# Altium PCB ClickBoard.PcbDoc
Units mm, origin at the board's own origin, x right, y up, seen from the top; angles counter-clockwise.
Board outline 25.4 x 57.15 mm, 2 copper layers (Top Layer, Bottom Layer); 52 components, 58 nets, 189 pads, 225 vias.
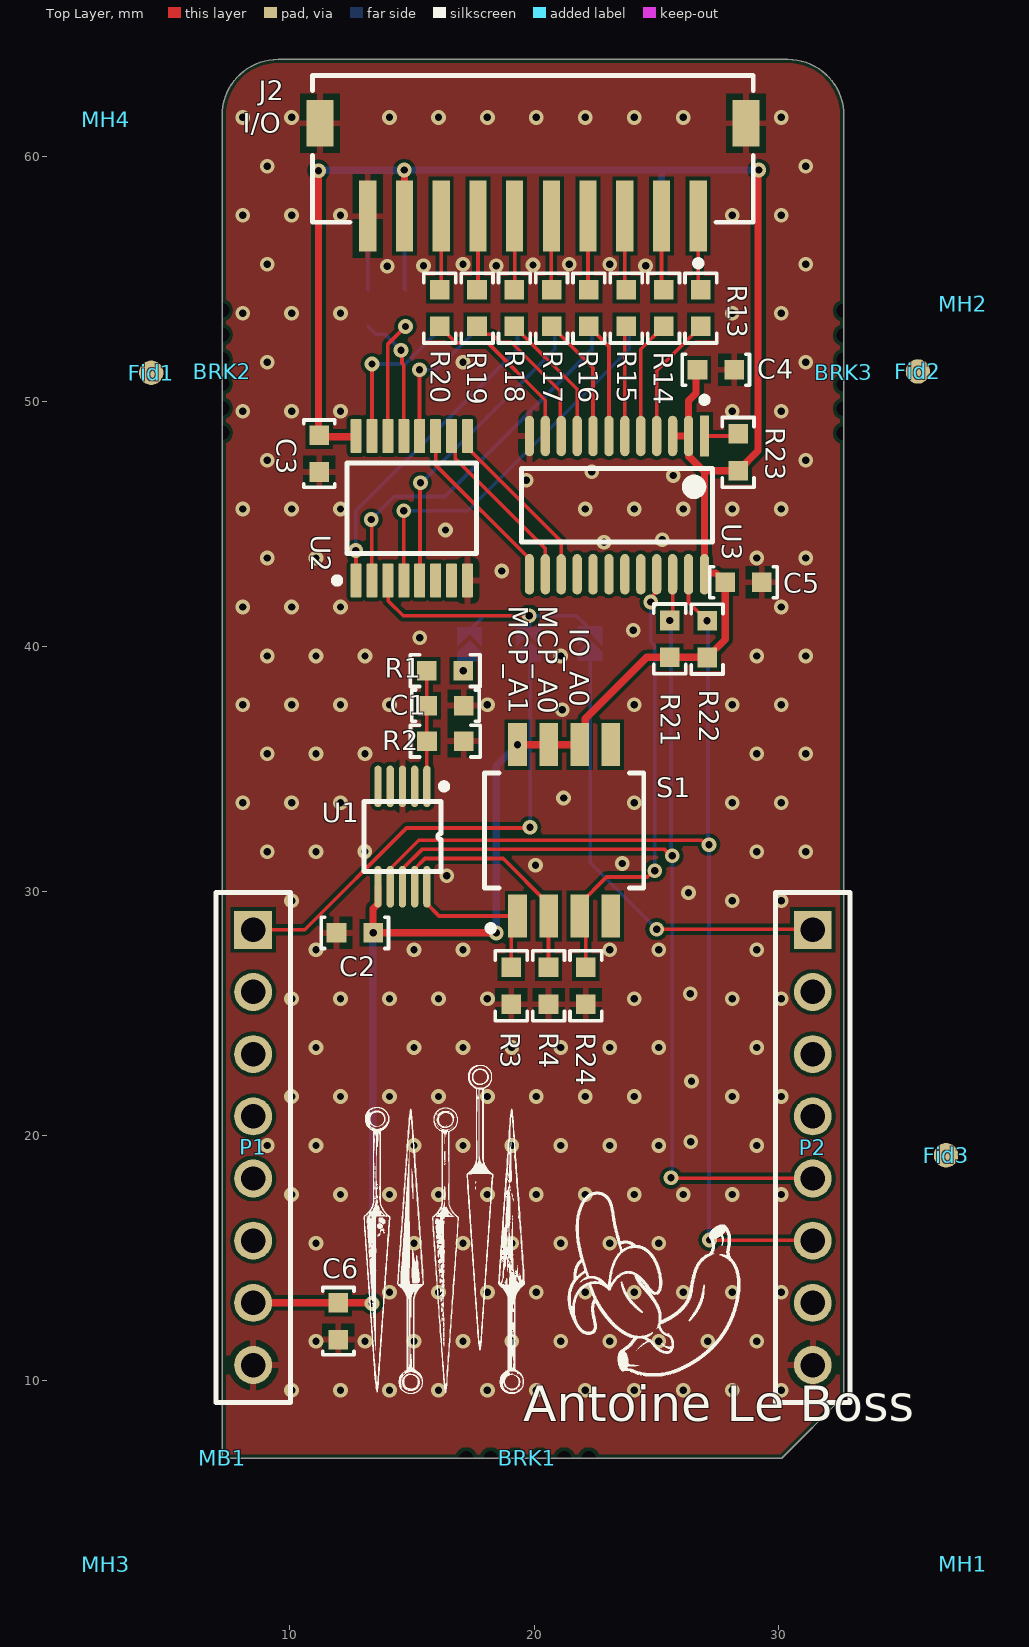
[diagram p0: Top Layer view]
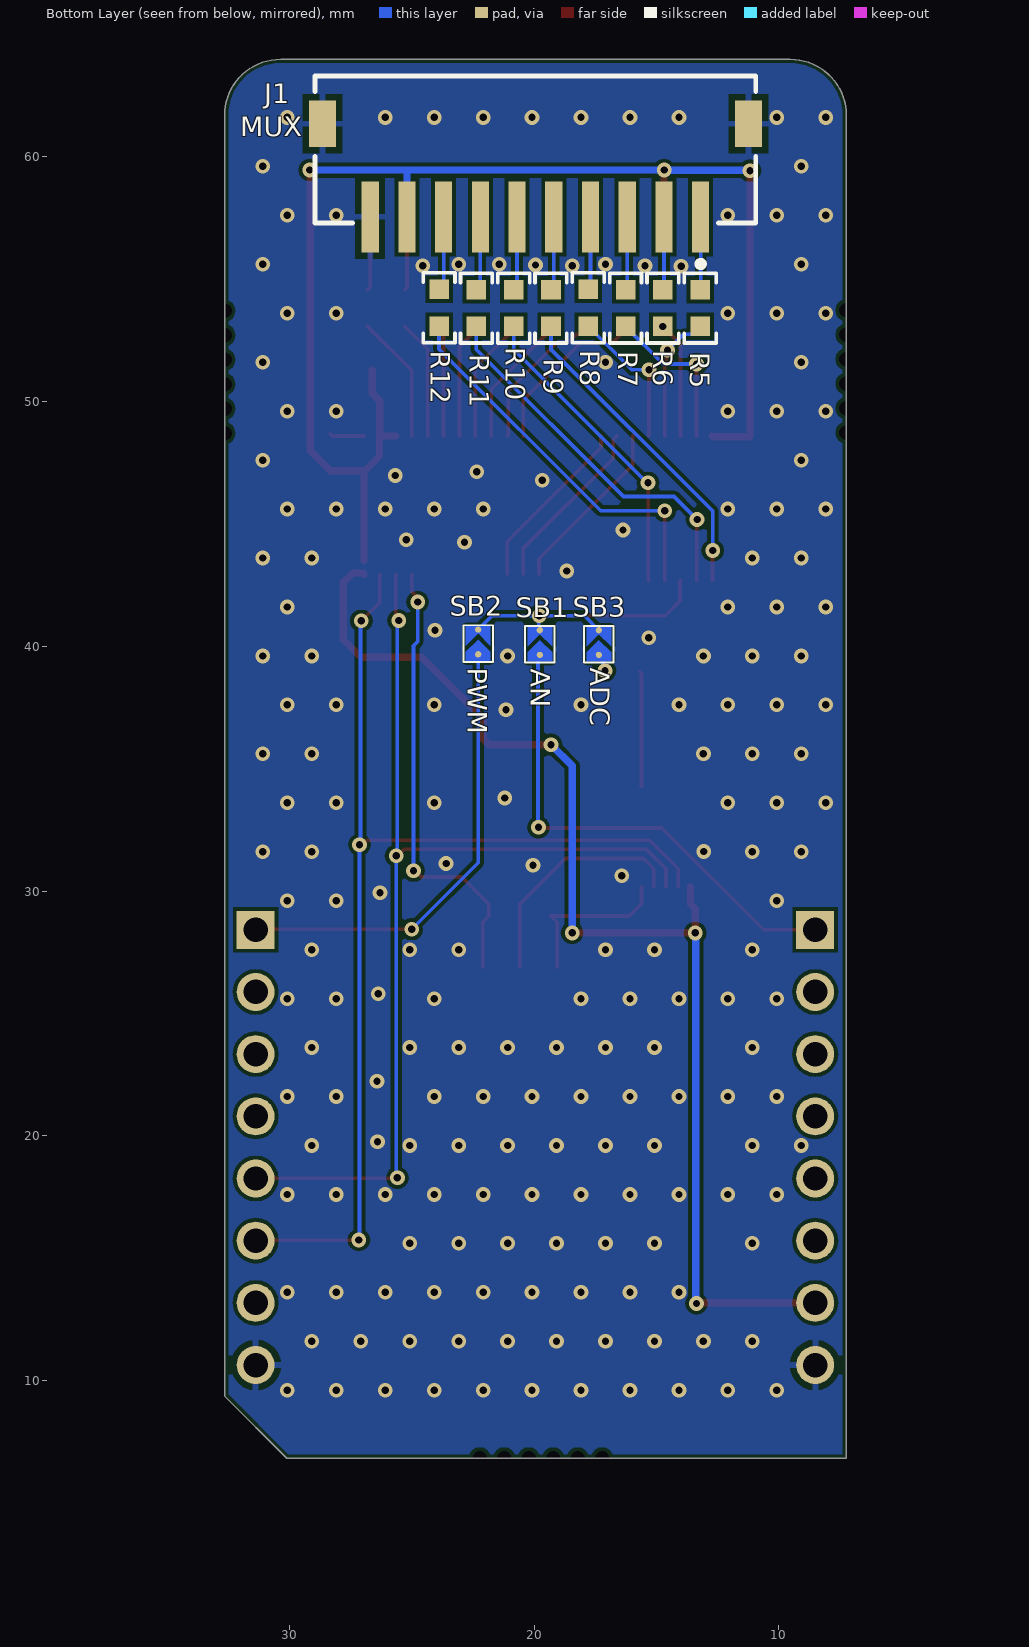
[diagram p1: Bottom Layer view, seen from below]

## Layer stack, top to bottom
Top Solder: solder mask 0.0102, Solder Resist, Dk 3.5
Top Layer: signal copper 0.0356
Dielectric 1: dielectric 0.32, FR-4, Dk 4.8
Bottom Layer: signal copper 0.0356
Bottom Solder: solder mask 0.0102, Solder Resist, Dk 3.5

## Board outline
7.25,6.825 7.25,61.689 cw(c9.536,61.689) 9.536,63.975 30.364,63.975 cw(c30.364,61.689) 32.65,61.689 32.65,9.365 30.11,6.825

## Design rules (kind name [scope] priority, off if disabled: settings)
BoardOutlineClearance [All] p1: gap=0.15 ignorepadtopadclearanceinfootprint=FALSE
Clearance [All] p1: gap=0.15 ignorepadtopadclearanceinfootprint=FALSE
ComponentClearance [All] p1: gap=0.254 collisioncheckmode=3 verticalgap=0.254 showdistances=FALSE donotcheckwithout3dbody=TRUE
HoleToHoleClearance [All] p1: gap=0.1 allowstackedmicrovias=TRUE
MinimumSolderMaskSliver [All] p1: minsoldermaskwidth=0.05
PlaneConnect PlaneConnectStitches [InNet('GND')] p1: pad.planeconnectstyle=Relief pad.reliefexpansion=0.508 pad.reliefentries=4 pad.reliefconductorwidth=0.254 pad.reliefairgap=0.254 via.planeconnectstyle=Direct via.reliefexpansion=0.508 via.reliefentries=4 via.reliefconductorwidth=0.254 via.reliefairgap=0.254
PlaneConnect [All] p2: planeconnectstyle=Relief reliefexpansion=0.508 reliefentries=4 reliefconductorwidth=0.254 reliefairgap=0.254
PolygonConnect [InNet('GND') vs InNet('GND')] p1: thpad.connectstyle=Relief thpad.reliefconductorwidth=0.254 thpad.reliefentries=4 thpad.polygonreliefangle="90 Angle" thpad.airgapwidth=0.254 smdpad.connectstyle=Relief smdpad.reliefconductorwidth=0.254 smdpad.reliefentries=4 smdpad.polygonreliefangle="90 Angle" smdpad.airgapwidth=0.254 via.connectstyle=Direct via.reliefconductorwidth=0.254 via.reliefentries=4 via.polygonreliefangle="90 Angle" via.airgapwidth=0.254
RoutingVias [All] p1: holewidth=0.3 width=0.6 viastyle="Through Hole" minholewidth=0.3 minwidth=0.6 maxholewidth=0.3 maxwidth=0.6
SilkToSilkClearance [All] p1: silktosilkclearance=0
SilkToSolderMaskClearance [IsPad] p1: minsilkscreentomaskgap=0 clearancetoexposedcopper=TRUE
SolderMaskExpansion [All] p1: expansion=0 istentingtop=FALSE
SupplyNets "Schematic Supply Nets_2" [InNet('3V3')] p1: voltage=0.000
SupplyNets "Schematic Supply Nets_1" [InNet('GND')] p2: voltage=0.000
SupplyNets "Schematic Supply Nets" [InNet('5V')] p3: voltage=0.000
Width WidthPWR [InNet('3V3')] p1: maxlimit=0.3 minlimit=0.3 preferedwidth=0.3
Width Widthall [All] p2: maxlimit=0.15 minlimit=0.15 preferedwidth=0.15
24 further rules are at their usual default settings.

## Classes and differential pairs
component class Page_Tete: BRK1 BRK2 BRK3 Fid1 Fid2 Fid3 MH1 MH2 MH3 MH4
net class S[0..7]: S0 S1 S2 S3 S4 S5 S6 S7
net class "P1 [0..2]": "P1 0" "P1 1" "P1 2"
net class "P0 [0..7]": "P0 0" "P0 1" "P0 2" "P0 3" "P0 4" "P0 5" "P0 6" "P0 7"
component class U_Selecteur: C3 SB1 SB2 SB3 U2
component class U_IOexpander: C4 C5 R21 R22 R23 R24 U3
component class U_Alimentation: C6 J1 J2 MB1 P1 P2 R5 R6 R7 R8 R9 R10 R11 R12 R13 R14 R15 R16 R17 R18 R19 R20
component class U_ADC: C1 C2 R1 R2 R3 R4 S1 U1

## Components (designator, comment, footprint, x,y, rotation, side; value= is the part's Value field where it differs from the comment)
BRK1 "DNP" BK_CRACK1B_M 22.225,6.825 r0 top value="Mouse Bites 2mm"
BRK2 "DNP" BK_CRACK1B_M 7.25,48.725 r270 top value="Mouse Bites 2mm"
BRK3 "DNP" BK_CRACK1B_M 32.65,53.7 r90 top value="Mouse Bites 2mm"
C1 "CAP CER 100nF 50V 0603" C_1608[0603] 16.375,37.575 r180 top value=100nF
C2 "CAP CER 100nF 50V 0603" C_1608[0603] 12.672,28.288 r0 top value=100nF
C3 "CAP CER 100nF 50V 0603" C_1608[0603] 11.222,47.869 r90 top value=100nF
C4 "CAP CER 100nF 50V 0603" C_1608[0603] 27.419,51.291 r180 top value=100nF
C5 "CAP CER 100nF 50V 0603" C_1608[0603] 28.549,42.611 r180 top value=100nF
C6 "CAP CER 2.2uF 10V X7R 0603" C_1608[0603] 12,12.425 r90 top value=2.2uF
Fid1 "DNP" FD_Fiducial 4.35,51.175 r0 top value="Fiducial mark"
Fid2 "DNP" FD_Fiducial 35.675,51.225 r90 top value="Fiducial mark"
Fid3 "DNP" FD_Fiducial 36.825,19.2 r90 top value="Fiducial mark"
J1 "HC-ZH-10PWT" J_S10B-ZR-SM4 19.95,60.292 r0 bottom
J2 "HC-ZH-10PWT" J_S10B-ZR-SM4 19.95,60.32 r180 top
MB1 "mikroBUS" mikroBUS-Large-No-Connector 7.25,6.825 r0 top locked
MH1 "DNP" MP_M-Hole_M2-NonPlated 37.5,2.5 r0 top value="Mounting Hole 2mm non plated"
MH2 "DNP" MP_M-Hole_M2-NonPlated 37.5,54 r90 top value="Mounting Hole 2mm non plated"
MH3 "DNP" MP_M-Hole_M2-NonPlated 2.5,2.5 r90 top value="Mounting Hole 2mm non plated"
MH4 "DNP" MP_M-Hole_M2-NonPlated 2.5,61.5 r90 top value="Mounting Hole 2mm non plated"
P1 "ESQ-108-14-T-S" CONN_SKT_01X08_100MIL-ELEVATED-LONGPIN 8.52,19.525 r270 top
P2 "ESQ-108-14-T-S" CONN_SKT_01X08_100MIL-ELEVATED-LONGPIN 31.38,19.525 r270 top
R1 "Res 1k 1% 0603" R_1608[0603] 16.358,39.002 r180 top value=1k
R2 "Res 1k 1% 0603" R_1608[0603] 16.37,36.126 r180 top value=1k
R3 "Res 10k 1% 0603" R_1608[0603] 19.061,26.129 r90 top value=10k
R4 "Res 10k 1% 0603" R_1608[0603] 20.585,26.129 r90 top value=10k
R5 "Res 1k 1% 0603" R_1608[0603] 13.219,53.815 r270 bottom value=1k
R6 "Res 1k 1% 0603" R_1608[0603] 14.743,53.815 r270 bottom value=1k
R7 "Res 1k 1% 0603" R_1608[0603] 16.267,53.815 r270 bottom value=1k
R8 "Res 1k 1% 0603" R_1608[0603] 17.791,53.827 r270 bottom value=1k
R9 "Res 1k 1% 0603" R_1608[0603] 19.315,53.815 r270 bottom value=1k
R10 "Res 1k 1% 0603" R_1608[0603] 20.839,53.815 r270 bottom value=1k
R11 "Res 1k 1% 0603" R_1608[0603] 22.363,53.815 r270 bottom value=1k
R12 "Res 1k 1% 0603" R_1608[0603] 23.887,53.827 r270 bottom value=1k
R13 "Res 1k 1% 0603" R_1608[0603] 26.808,53.815 r270 top value=1k
R14 "Res 1k 1% 0603" R_1608[0603] 25.284,53.815 r270 top value=1k
R15 "Res 1k 1% 0603" R_1608[0603] 23.76,53.815 r270 top value=1k
R16 "Res 1k 1% 0603" R_1608[0603] 22.236,53.815 r270 top value=1k
R17 "Res 1k 1% 0603" R_1608[0603] 20.712,53.815 r270 top value=1k
R18 "Res 1k 1% 0603" R_1608[0603] 19.188,53.815 r270 top value=1k
R19 "Res 1k 1% 0603" R_1608[0603] 17.664,53.815 r270 top value=1k
R20 "Res 1k 1% 0603" R_1608[0603] 16.14,53.815 r270 top value=1k
R21 "Res 10k 1% 0603" R_1608[0603] 25.538,40.302 r270 top value=10k
R22 "Res 10k 1% 0603" R_1608[0603] 27.062,40.29 r270 top value=10k
R23 "Res 10k 1% 0603" R_1608[0603] 28.332,47.922 r270 top value=10k
R24 "Res 10k 1% 0603" R_1608[0603] 22.109,26.129 r90 top value=10k
S1 "DSHP04TSGER" S_DIP_SWITCH_50MIL_4POS 21.22,32.479 r0 top value="DIP Switch 4pos"
SB1 "Open" SB-TINY-OPEN 19.772,40.15 r90 bottom
SB2 "Open" SB-TINY-OPEN 22.287,40.175 r90 bottom
SB3 "Open" SB-TINY-OPEN 17.359,40.15 r90 bottom
U1 "MCP3423-E/UN" U_MSOP50P300X500-10(RM-10)_WO-TP 14.616,32.225 r180 top
U2 "TMUX1308PWR" U_TSSOP65P500X450-16 14.997,45.636 r0 top
U3 "PCAL6416APW,118" U_TSSOP24_SOT355-1-IPC_B 23.379,45.763 r180 top

## Footprints (in the part's own frame and the unit in brackets; to place one, negate y for a bottom-side part, rotate by r counter-clockwise, add the part's x,y. Pads: shape width x height; smd on the part's side, far side on the other; paste and mask are expansions set on the pad)
BK_CRACK1B_M [mm] "Cracker métrique NPTH"
  round 0 hole 0.6 unplated: 1(0,0) 2(-1,0) 3(-2,0) 4(-3,0) 5(-4,0) 6(-5,0)
C_1608[0603] [mm] "Capacitor MLCC; Body 1.6 x 0.8 mm (LxW typ)"
  rect 0.8x0.8 smd: 1(-0.75,0) 2(0.75,0)
  silkscreen extent -1.38,-0.64 1.38,0.64, body extent -0.8,-0.4 0.8,0.4, height 0.8
CONN_SKT_01X08_100MIL-ELEVATED-LONGPIN [mm] "SQ Post Socket, 1x8 Pins, Vertical, 2.54mm Pitch, Female"
  rect 1.55x1.55 hole 1: 1(-8.89,0)
  round 1.55 hole 1: 2(-6.35,0) 3(-3.81,0) 4(-1.27,0) 5(1.27,0) 6(3.81,0) 7(6.35,0) 8(8.89,0)
  silkscreen extent -10.41,-1.52 10.42,1.52, body extent -10.66,-1.37 10.66,1.37, height 0.25
FD_Fiducial [mm] "Fiducial"
  round 1 smd paste-0.5 mask+1: 1(0,0)
J_S10B-ZR-SM4 [mm] "CONN HEADER SMD 10POS 1MM5 RA"
  rect 0.7x2.9 smd paste+0 mask+0: 1(-6.75,2.75) 2(-5.25,2.75) 3(-3.75,2.75) 4(-2.25,2.75) 5(-0.75,2.75) 6(0.75,2.75) 7(2.25,2.75) 8(3.75,2.75) 9(5.25,2.75) 10(6.75,2.75)
  rect 1.1x1.9 smd paste+0 mask+0: 11(8.7,-1.05) 12(-8.7,-1.05)
  silkscreen extent -9,-3 9,4.8, body extent -9,-3 9,3.5, height 3.7
mikroBUS-Large-No-Connector [mm]
MP_M-Hole_M2-NonPlated [mm] "Monting Hole M2 non plated"
  round 1.5 hole 2 unplated paste-2539.97: 1(0,0)
R_1608[0603] [mm] "Chip Resistor; Body 1.6 x 0.8 mm (LxW typ)"
  rect 0.8x0.8 smd: 1(-0.75,0) 2(0.75,0)
  silkscreen extent -1.43,-0.65 1.43,0.65, body extent -0.77,-0.42 0.78,0.43, height 0.45
S_DIP_SWITCH_50MIL_4POS [mm] "Dip switch 4pos, pitch 1.27mm, height 1.55mm"
  rect 0.76x1.75 smd paste+0 mask+0: 1(-1.903,-3.5) 2(-0.633,-3.5) 3(0.637,-3.5) 4(1.907,-3.5) 5(1.907,3.5) 6(0.637,3.5) 7(-0.633,3.5) 8(-1.903,3.5)
  silkscreen extent -3.25,-4.12 3.26,2.35, body extent -3.35,-3.8 3.36,3.8, height 0.25
SB-TINY-OPEN [mil]
  round 10 smd paste-10 mask+0.04: 1(-19.84,0)
  round 10 smd paste-10.08 mask+0.04: 2(19.84,0)
  Top Layer region: -6.06,19.68 13.62,0 -6.06,-19.68 24.84,-19.68 24.84,19.68
  Top Layer region: -30.16,-19.68 -30.16,19.68 -15.91,19.68 3.78,0 -15.91,-19.68
  silkscreen extent -32,-24 27,24
U_MSOP50P300X500-10(RM-10)_WO-TP [mm] "Shrink Small Outline; 10 Leads; Body Width 3 mm; Pitch 0.5 mm"
  oval 0.3x1.7 smd mask+0.05: 1(-1,-2.05) 2(-0.5,-2.05) 3(0,-2.05) 4(0.5,-2.05) 5(1,-2.05) 6(1,2.05) 7(0.5,2.05) 8(0,2.05) 9(-0.5,2.05) 10(-1,2.05)
  silkscreen extent -1.83,-2.17 1.58,1.43, body extent -1.6,-2.58 1.6,2.57, height 1.09
U_TSSOP24_SOT355-1-IPC_B [mm]
  rect 0.381x1.655 smd paste+0 mask+0: 1(-3.575,-2.825)
  rrect100% 0.381x1.655 smd paste+0 mask+0: 2(-2.925,-2.825) 3(-2.275,-2.825) 4(-1.625,-2.825) 5(-0.975,-2.825) 6(-0.325,-2.825) 7(0.325,-2.825) 8(0.975,-2.825) 9(1.625,-2.825) 10(2.275,-2.825) 11(2.925,-2.825) 12(3.575,-2.825) 13(3.575,2.825) 14(2.925,2.825) 15(2.275,2.825) 16(1.625,2.825) 17(0.975,2.825) 18(0.325,2.825) 19(-0.325,2.825) 20(-0.975,2.825) 21(-1.625,2.825) 22(-2.275,2.825) 23(-2.925,2.825) 24(-3.575,2.825)
  silkscreen extent -3.9,-4.43 3.9,1.5, body extent -4.15,-3.9 4.15,3.9, height 0.25
U_TSSOP65P500X450-16 [mm] "SOP, 16-Leads, Body 5x4.5mm, Pitch 0.65mm, IPC Medium Density"
  rrect22% 0.45x1.4 smd: 1(-2.275,-2.95) 2(-1.625,-2.95) 3(-0.975,-2.95) 4(-0.325,-2.95) 5(0.325,-2.95) 6(0.975,-2.95) 7(1.625,-2.95) 8(2.275,-2.95) 9(2.275,2.95) 10(1.625,2.95) 11(0.975,2.95) 12(0.325,2.95) 13(-0.325,2.95) 14(-0.975,2.95) 15(-1.625,2.95) 16(-2.275,2.95)
  silkscreen extent -3.17,-3.07 2.65,1.85, body extent -3,-4.35 3,4.35, height 0.25

## Part data
BRK1 BRK2 BRK3: library part BK_BREAKOUT_2MM, "Mouse Bites", Mounting Technology=N/A
C1 C2 C3 C4 C5: library part CAP002, "Capacitor type 1", Dielectric=X7R, Manufacturer 1=Yageo, Manufacturer Part Number 1=CC0603KRX7R9BB104, Rated Voltage=50V, Supplier Part Number 1=C14663, Tolerance=10%, Code CEGEP=COND0143SM, LibRef=CAP002, Mounting Technology=SMT, Supplier 1=LCSC
C6: library part CAP022, "Capacitor type 1", Dielectric=X7R, Manufacturer 1=Samsung, Manufacturer Part Number 1=CL10B225KP8NNNC, Rated Voltage=10V, Supplier Part Number 1=C100082, Tolerance=10%, LibRef=CAP022, Mounting Technology=SMT, Supplier 1=LCSC
Fid1 Fid2 Fid3: library part Fiducial, "Fiducial mark for alignement and Pick&Place", Mounting Technology=N/A
J1 J2: library part CONN-1MM5-01X10-S10B-H-SMT, "CONN wire to board SMT R/A 10POS 1.5mm", Manufacturer 1=HCTL, Manufacturer 2=JST, Manufacturer Part Number 2=S10B-ZR-SM4A-TF(LF)(SN), Supplier Part Number 1=C2845432, Manufacturer Part Number 1=HC-ZH-10PWT, Mounting Technology=SMT, Supplier 1=LCSC, Supplier 2=LCSC, Supplier 3=Digikey, Supplier Part Number 2=C5149249, Supplier Part Number 3=455-1700-1-ND
MB1: library part "mikroBUS compatible add-on board", "mikroBUS compatible add-on board"
MH1 MH2 MH3 MH4: library part MH-2MM_NP, "Mounting Hole 2mm non plated", Supplier Part Number 1=N/A, Manufacturer Part Number 1=DNP, Mounting Technology=N/A
P1 P2: library part CONN-100MIL-SKT-01X08_ELEVATED_LONGPIN, "CONN SOCKET 8pos 100mils Elevated", Manufacturer 1=Samtec, Supplier Part Number 1=SAM9303-ND, Manufacturer Part Number 1=ESQ-108-14-T-S, Mounting Technology=TH, Supplier 1=Digikey
R1 R2 R5 R6 R7 R8 R9 R10 R11 R12 R13 R14 R15 R16 R17 R18 R19 R20: library part RES015, "Resistor type 1", Manufacturer 1=Yageo, Manufacturer Part Number 1=RC0603FR-071KL, Max Working Voltage=75V, Supplier Part Number 1=C22548, Tolerance=1%, LibRef=RES015, Mounting Technology=SMT, Puissance=1/10W, Supplier 1=LCSC
R3 R4 R21 R22 R23 R24: library part RES001, "Resistor type 1", Manufacturer 1=Yageo, Manufacturer Part Number 1=RC0603FR-0710KL, Max Working Voltage=75V, Supplier Part Number 1=C98220, Tolerance=1%, Code CEGEP=RESI0238-0603, LibRef=RES001, Mounting Technology=SMT, Puissance=1/10W, Supplier 1=LCSC
S1: library part SW_DIP_50MIL_4POS, "SWITCH DIP SLIDE SPST 25MA 24V, pitch 1.27mm, height 1.55mm", Manufacturer 1=kangshen, Manufacturer 2=Omron, Manufacturer Part Number 2=A6H-4102-PM, Supplier Part Number 1=C3293144, Manufacturer Part Number 1=DSHP04TSGER, Mounting Technology=SMT, Supplier 1=LCSC, Supplier 2=LCSC, Supplier 3=Digikey, Supplier Part Number 2=C2733274, Supplier Part Number 3=39-A6H-4102-PMCT-ND
SB1 SB2 SB3: library part Solder-Jumper-Open, "Solder Jumper"
U1: library part U_MCP3423-E/UN, "CAN Controller Stand-Alone With SPI, 18-Pin PDIP", Manufacturer 1=Microchip, Supplier Part Number 1=C220864, Manufacturer Part Number 1=MCP3423-E/UN, Mounting Technology=SMT, Supplier 1=LCSC, Supplier 2=Digikey, Supplier Part Number 2=MCP3423-E/UN-ND
U2: library part U_TMUX1308PWR, "IC MUX 8:1 195OHM 16TSSOP", Manufacturer 1=TI, Supplier Part Number 1=C970231, Manufacturer Part Number 1=TMUX1308PWR, Mounting Technology=SMT, Supplier 1=LCSC, Supplier 2=Digikey, Supplier Part Number 2=296-TMUX1308PWRCT-ND
U3: library part U_PCAL6416APW, "IC I/O EXPANDER 16BIT 24TSSOP", Manufacturer 1="Texas Instruments", Manufacturer 2="NXP Semiconductors", Manufacturer Part Number 1=TCA6416APWR, Supplier Part Number 1=C130203, Manufacturer Part Number 2=PCAL6416APW,118, Mounting Technology=SMT, Supplier 1=LCSC, Supplier 2=LCSC, Supplier 3=Digikey, Supplier Part Number 2=C2652299, Supplier Part Number 3=568-9922-1-ND

## Via types
v1: diameter 0.6, hole 0.3, Top Layer to Bottom Layer, tented both sides, 221 vias
v2: diameter 0.6, hole 0.3, Top Layer to Bottom Layer, tented bottom, 4 vias

## Nets (pads, with @x,y where several pads share a name; then routed paths per layer and width w, separated by ;. In a path a pad name is that pad's centre, name@x,y a point inside that pad or via, vN(x,y) a via of type N, cw(c..) or ccw(c..) an arc to the next point about the centre after c; other vN are vias at no path point)
3V3: C2.2 C3.2 C4.2 C5.2 C6.2 J1.9 J2.9 P1.7 R21.2 R22.2 R23.2 S1.6 S1.7 S1.8 U1.6 U2.16 U3.2 U3.3 U3.24 | length 106.3
  Top Layer w0.3: P1.7 13.346,13.175 v1(13.371,13.15) ; v1(11.187,59.428) 11.187,48.557 12.693,48.557 U2.16 ; C2.2@13.415,28.288 13.415,29.274 13.616,29.475 U1.6 ; v1(13.422,28.288) v1(18.451,28.288) ; J2.9 v1@14.7,59.479 ; v2(19.317,35.979) S1.7 S1.6 22.087,36.209 22.087,37.041 24.598,39.552 R21.2 25.544,39.546 27.056,39.546 R22.2 27.799,40.277 C5.2 27.419,42.991 26.991,42.991 26.954,42.954 U3.24 ; U3.3 U3.2 ; C4.2@26.612,51.275 26.612,50.335 26.304,50.027 U3.2 ; U3.24@26.954,43.484 26.954,47.127 ; v1(29.17,59.454) 29.145,59.428 29.145,47.985 R23.2 26.999,47.172 26.954,47.127 ; U3.2 26.319,48.573 26.319,47.762 26.954,47.127
  Bottom Layer w0.3: v1(11.187,59.428) 11.2,59.441 14.679,59.441 v1(14.692,59.454) 25.2,59.454 ; v1(13.371,13.15) 13.397,13.175 13.397,28.263 v1(13.422,28.288) ; v1(18.451,28.288) 18.451,35.113 v2(19.317,35.979) ; J1.9 25.2,59.454 ; v1(29.17,59.454) 25.2,59.454
5V: P2.7
ADC: R1.1 SB3.1 | length 0.7
  Bottom Layer w0.15: v2(17.108,39.002) 17.194,39.089 17.194,39.452 17.359,39.618 SB3.1
AN: P1.1 SB1.1 | length 19.8
  Top Layer w0.15: P1.1 10.626,28.415 14.786,32.575 19.8,32.575 v1(19.825,32.6)
  Bottom Layer w0.15: v1(19.825,32.6) 19.842,32.617 19.842,39.339
CS: P1.3
E\N\: U2.6
GND: C1.1 C2.1 C3.1 C4.1 C5.1 C6.1 J1.10 J1.11 J1.12 J2.10 J2.11 J2.12 P1.8 P2.8 R2.1 R3.1 R4.1 R24.1 U1.3 U2.8 U3.12
  other v1: 10.088,9.604 12.088,9.604 14.088,9.604 16.088,9.604 18.088,9.604 20.088,9.604 22.088,9.604 24.088,9.604 26.088,9.604 28.088,9.604 30.088,9.604 11.088,11.604 13.088,11.604 15.088,11.604 17.088,11.604 19.088,11.604 21.088,11.604 23.088,11.604 25.088,11.604 27.088,11.604 29.088,11.604 14.088,13.604 16.088,13.604 18.088,13.604 20.088,13.604 22.088,13.604 24.088,13.604 26.088,13.604 28.088,13.604 30.088,13.604 11.088,15.604 15.088,15.604 17.088,15.604 19.088,15.604 21.088,15.604 23.088,15.604 25.088,15.604 10.088,17.604 12.088,17.604 14.088,17.604 16.088,17.604 18.088,17.604 20.088,17.604 22.088,17.604 24.088,17.604 26.088,17.604 28.088,17.604 30.088,17.604 9.088,19.604 11.088,19.604 15.088,19.604 17.088,19.604 19.088,19.604 21.088,19.604 23.088,19.604 25.088,19.604 29.088,19.604 26.4,19.75 10.088,21.604 12.088,21.604 14.088,21.604 16.088,21.604 18.088,21.604 20.088,21.604 22.088,21.604 24.088,21.604 28.088,21.604 30.088,21.604 26.425,22.225 11.088,23.604 15.088,23.604 17.088,23.604 19.088,23.604 21.088,23.604 23.088,23.604 25.088,23.604 29.088,23.604 10.088,25.604 12.088,25.604 14.088,25.604 16.088,25.604 18.088,25.604 24.088,25.604 28.088,25.604 30.088,25.604 26.375,25.8 11.088,27.604 15.088,27.604 17.088,27.604 23.088,27.604 25.088,27.604 29.088,27.604 10.088,29.604 28.088,29.604 30.088,29.604 26.3,29.925 16.425,30.625 20.05,31.05 23.6,31.125 9.088,31.604 11.088,31.604 13.08,31.612 29.088,31.604 31.088,31.604 8.088,33.604 10.088,33.604 12.088,33.604 24.088,33.604 28.088,33.604 30.088,33.604 21.2,33.8 9.088,35.604 11.088,35.604 13.088,35.604 29.088,35.604 31.088,35.604 21.15,37.4 8.088,37.604 10.088,37.604 12.088,37.604 14.088,37.604 18.088,37.604 24.088,37.604 28.088,37.604 30.088,37.604 9.088,39.604 11.088,39.604 13.088,39.604 21.088,39.604 29.088,39.604 31.088,39.604 15.325,40.35 24.05,40.65 8.088,41.604 10.088,41.604 12.088,41.604 30.088,41.604 18.675,43.075 9.088,43.604 11.088,43.604 29.088,43.604 31.088,43.604 22.85,44.25 25.225,44.35 16.375,44.75 8.088,45.604 10.088,45.604 12.088,45.604 22.088,45.604 24.088,45.604 26.088,45.604 28.088,45.604 30.088,45.604 19.675,46.775 25.675,46.975 22.35,47.125 9.088,47.604 31.088,47.604 8.088,49.604 10.088,49.604 12.088,49.604 28.088,49.604 30.088,49.604 9.088,51.604 17.088,51.604 31.088,51.604 8.088,53.604 10.088,53.604 12.088,53.604 28.088,53.604 30.088,53.604 14,55.525 15.475,55.55 18.45,55.55 24.55,55.55 19.95,55.575 9.088,55.604 17.088,55.604 21.425,55.6 23.088,55.604 31.088,55.604 8.088,57.604 10.088,57.604 12.088,57.604 28.088,57.604 30.088,57.604 9.088,59.604 31.088,59.604 8.088,61.604 10.088,61.604 14.088,61.604 16.088,61.604 18.088,61.604 20.088,61.604 22.088,61.604 24.088,61.604 26.088,61.604 30.088,61.604
I\N\T\: R23.1 U3.1 | length 1.4
  Top Layer w0.15: U3.1 28.248,48.589 R23.1
INT: P2.2
MISO: P1.5
MOSI: P1.6
NetC1_2: C1.2 R1.2 R2.2 U1.1 | length 4.7
  Top Layer w0.15: U1.1 15.616,38.882 R1.2@15.69,38.956
NetJ1_1: J1.1 R5.1 | length 3
  Bottom Layer w0.15: J1.1 13.2,54.584 R5.1
NetJ1_2: J1.2 R6.1 | length 3
  Bottom Layer w0.15: J1.2 14.7,54.608 R6.1
NetJ1_3: J1.3 R7.1 | length 3
  Bottom Layer w0.15: J1.3 16.2,54.632 R7.1
NetJ1_4: J1.4 R8.1 | length 3
  Bottom Layer w0.15: J1.4 17.7,54.668 R8.1
NetJ1_5: J1.5 R9.1 | length 3
  Bottom Layer w0.15: J1.5 19.2,54.68 R9.1
NetJ1_6: J1.6 R10.1 | length 3
  Bottom Layer w0.15: J1.6 20.7,54.704 R10.1
NetJ1_7: J1.7 R11.1 | length 3
  Bottom Layer w0.15: J1.7 22.2,54.728 R11.1
NetJ1_8: J1.8 R12.1 | length 3
  Bottom Layer w0.15: J1.8 23.7,54.764 R12.1
NetJ2_1: J2.1 R13.1 | length 3
  Top Layer w0.15: J2.1 26.7,54.673 R13.1
NetJ2_2: J2.2 R14.1 | length 3
  Top Layer w0.15: J2.2 25.2,54.649 R14.1
NetJ2_3: J2.3 R15.1 | length 3
  Top Layer w0.15: J2.3 23.7,54.625 R15.1
NetJ2_4: J2.4 R16.1 | length 3
  Top Layer w0.15: J2.4 22.2,54.601 R16.1
NetJ2_5: J2.5 R17.1 | length 3
  Top Layer w0.15: J2.5 20.7,54.577 R17.1
NetJ2_6: J2.6 R18.1 | length 3
  Top Layer w0.15: R18.1 19.2,54.577 J2.6
NetJ2_7: J2.7 R19.1 | length 3
  Top Layer w0.15: R19.1 17.7,54.601 J2.7
NetJ2_8: J2.8 R20.1 | length 3
  Top Layer w0.15: R20.1 16.2,54.625 J2.8
NetR3_2: R3.2 S1.1 U1.10 | length 6.8
  Top Layer w0.15: U1.10 15.616,29.475 16.113,28.979 S1.1 19.061,28.723 R3.2
NetR4_2: R4.2 S1.2 U1.9 | length 9.7
  Top Layer w0.15: U1.9 15.116,30.906 15.536,31.325 18.736,31.325 20.587,29.474 S1.2 20.585,28.977 R4.2
NetR24_2: R24.2 S1.3 U3.21 | length 18.6
  Top Layer w0.15: R24.2 22.109,28.727 S1.3 21.857,29.474 22.958,30.575 24.616,30.575 24.869,30.828 v1(24.928,30.828) ; v1(24.764,41.808) 24.85,41.895 24.85,42.084 25.004,42.238 U3.21
  Bottom Layer w0.15: v1(24.764,41.808) 24.764,40.186 24.928,40.022 v1(24.928,30.828)
NetSB1_2: SB1.2 SB2.2 SB3.2 U2.3 | length 12.9
  Top Layer w0.15: U2.3 14.041,42.667 14.041,41.849 14.648,41.242 v1(19.798,41.242)
  Bottom Layer w0.15: SB3.2 17.947,41.242 v1(19.798,41.242) ; SB1.2@19.81,40.654 19.81,41.229 v1(19.798,41.242) ; SB2.2 21.724,41.242 v1(19.798,41.242)
"P0 0": R13.2 U3.4 | length 5.2
  Top Layer w0.15: U3.4 25.004,51.261 R13.2
"P0 1": R14.2 U3.5 | length 4.9
  Top Layer w0.15: U3.5 24.354,52.135 R14.2
"P0 2": R15.2 U3.6 | length 4.4
  Top Layer w0.15: U3.6 R15.2@23.704,53.009
"P0 3": R16.2 U3.7 | length 4.8
  Top Layer w0.15: R16.2 23.054,52.247 U3.7
"P0 4": R17.2 U3.8 | length 5.2
  Top Layer w0.15: R17.2 22.404,51.373 U3.8
"P0 5": R18.2 U3.9 | length 5.5
  Top Layer w0.15: R18.2 21.754,50.499 U3.9
"P0 6": R19.2 U3.10 | length 6.3
  Top Layer w0.15: R19.2 17.989,52.74 18.285,52.74 18.607,52.418 19.061,52.418 21.065,50.414 21.065,48.628 U3.10
"P0 7": R20.2 U3.11 | length 7
  Top Layer w0.15: R20.2 16.815,52.39 18.11,52.39 20.454,50.046 U3.11
"P1 0": U2.11 U3.13 | length 7.2
  Top Layer w0.15: U2.11 15.972,47.407 19.804,43.575 U3.13
"P1 1": U2.10 U3.14 | length 7.2
  Top Layer w0.15: U2.10 16.772,48.436 16.772,47.673 20.454,43.991 U3.14
"P1 2": U2.9 U3.15 | length 7.2
  Top Layer w0.15: U2.9 17.272,48.111 21.104,44.279 U3.15
PWM: P2.1 SB2.1 | length 18.8
  Top Layer w0.15: v1(25.005,28.44) 31.355,28.44 P2.1
  Bottom Layer w0.15: SB2.1@22.287,39.762 22.287,31.158 v1(25.005,28.44)
RST: P1.2
RX: P2.4
S0: R5.2 U2.13 | length 5.3
  Top Layer w0.15: v1(14.556,52.097) 14.597,52.056 14.597,51.572 14.672,51.497 U2.13
  Bottom Layer w0.15: R5.2 13.544,52.74 13.913,52.74 v1(14.556,52.097)
S1: R6.2 U2.14 | length 4.8
  Top Layer w0.15: U2.14 14.022,52.344 v1(14.743,53.065)
S2: R7.2 U2.15 | length 6.5
  Top Layer w0.15: U2.15@13.372,48.587 v1(13.371,51.529)
  Bottom Layer w0.15: v1(13.371,51.529) 14.731,51.529 R7.2
S3: R8.2 U2.12 | length 5.9
  Top Layer w0.15: v1(15.312,51.29) 15.312,48.596 U2.12
  Bottom Layer w0.15: v1(15.312,51.29) 16.004,51.29 R8.2
S4: R9.2 U2.1 | length 13.1
  Top Layer w0.15: v1(12.711,43.909) 12.716,43.904 12.716,42.692 U2.1
  Bottom Layer w0.15: v1(12.711,43.909) 12.711,45.521 19.315,52.125 R9.2
S5: R10.2 U2.5 | length 12.7
  Top Layer w0.15: U2.5 15.337,42.702 15.337,46.662 v1(15.353,46.678)
  Bottom Layer w0.15: v1(15.353,46.678) 15.391,46.678 20.839,52.125 R10.2
S6: R11.2 U2.2 | length 15.3
  Top Layer w0.15: v1(13.346,45.179) 13.359,45.166 13.359,42.699 U2.2
  Bottom Layer w0.15: v1(13.346,45.179) 14.286,46.119 16.357,46.119 22.363,52.125 R11.2
S7: R12.2 U2.4 | length 15.7
  Top Layer w0.15: v1(14.667,45.535) 14.669,45.532 14.669,42.689 U2.4
  Bottom Layer w0.15: v1(14.667,45.535) 17.284,45.535 23.887,52.137 R12.2
SCK: P1.4
SCL: P2.5 R21.1 U1.8 U3.22 | length 42.8
  Top Layer w0.15: U1.8 14.616,30.906 15.411,31.7 25.327,31.7 25.589,31.438 v1(25.64,31.438) ; v2(25.538,41.052) 25.654,41.168 U3.22 ; v1(25.589,18.28) 25.601,18.268 31.367,18.268 P2.5
  Bottom Layer w0.15: v2(25.538,41.052) 25.589,41.001 v1@25.589,31.488 ; v1(25.589,18.28) 25.64,18.331 v1(25.64,31.438) v1@25.589,31.488 ; v1@25.589,31.438 v1@25.589,31.488
SDA: P2.6 R22.1 U1.7 U3.23 | length 46.1
  Top Layer w0.15: U1.7 14.116,30.906 15.286,32.075 26.836,32.075 27.016,31.895 v1(27.138,31.895) ; U3.23 26.304,41.798 v2(27.062,41.04) ; v1(27.164,15.74) 27.176,15.728 31.367,15.728 P2.6
  Bottom Layer w0.15: v2(27.062,41.04) 27.1,41.002 v1@27.1,31.933 ; v1@27.1,31.895 v1@27.1,31.933 ; v1(27.164,15.74) 27.138,15.766 v1(27.138,31.895) v1@27.1,31.933
TX: P2.3
pads on no net: BRK1.1 BRK1.2 BRK1.3 BRK1.4 BRK1.5 BRK1.6 BRK2.1 BRK2.2 BRK2.3 BRK2.4 BRK2.5 BRK2.6 BRK3.1 BRK3.2 BRK3.3 BRK3.4 BRK3.5 BRK3.6 Fid1.1 Fid2.1 Fid3.1 MH1.1 MH2.1 MH3.1 MH4.1 S1.4 S1.5 U1.2 U1.4 U1.5 U2.7 U3.16 U3.17 U3.18 U3.19 U3.20

## Polygon pours and split planes (outlines as drawn)
GND on Top Layer "GND_L01_P000" (solid, remove dead copper, pour order 0): 7.25,6.825 7.25,61.689 cw(c9.536,61.689) 9.536,63.975 30.364,63.975 cw(c30.364,61.689) 32.65,61.689 32.65,9.365 30.11,6.825
GND on Bottom Layer "GND_L02_P001" (solid, remove dead copper, pour order 1): 7.25,6.825 7.25,61.689 cw(c9.536,61.689) 9.536,63.975 30.364,63.975 cw(c30.364,61.689) 32.65,61.689 32.65,9.365 30.11,6.825

## Silkscreen, mask and mechanical layers (free items; w line width, h text height)
Top Overlay:
  drawing of 61 lines, arcs and shapes, not listed
  text "I/O" at 8.1,60.975 h0.8
  text "MCP_A1" at 18.958,41.65 h0.8 r270
  text "MCP_A0" at 20.158,41.65 h0.8 r270
  text "IO_A0" at 21.458,40.725 h0.8 r270
  text "Antoine Le Boss" at 19.549,7.844 h2.5
Bottom Overlay:
  text "MUX" at 32,60.825 h0.8
  text "ADC" at 17.721,39.114 h0.8 r90
  text "PWM" at 22.705,39.114 h0.8 r90
  text "AN" at 20.14,39.081 h0.8 r90
Filling:
  region: 24.895,11.741 24.895,11.729 24.883,11.729 24.883,11.741
  region: 25.083,11.402 25.096,11.402 25.096,11.39 25.083,11.39
  region: 25.498,11.264 25.51,11.264 25.51,11.252 25.498,11.252
  region: 25.071,11.415 25.071,11.427 25.083,11.427 25.083,11.415
  region: 25.096,11.427 25.083,11.427 25.083,11.44 25.096,11.44
  region: 24.933,11.54 24.945,11.54 24.945,11.528 24.933,11.528
  region: 24.694,11.754 24.682,11.754 24.682,11.766 24.694,11.766
  region: 27.594,15.218 27.594,15.23 27.606,15.23 27.606,15.218
  region: 27.744,15.958 27.757,15.958 27.757,15.946 27.744,15.946
  region: 24.958,11.503 24.958,11.528 24.971,11.528 24.971,11.503 24.983,11.503 24.983,11.49 24.971,11.49 24.971,11.503
  lines w0.254: 5.25,48.7 5.25,4.825 5.9,4.825 17.2,4.825 ; 5.25,53.75 5.25,64 0,64 0,0 40,0 40,64 34.65,64 34.65,53.725 ; 22.25,4.825 34.65,4.825 34.65,5.2 34.65,48.675 ; 7.25,6.825 7.25,61.689 cw(c9.536,61.689) 9.536,63.975 30.364,63.975 cw(c30.364,61.689) 32.65,61.689 32.65,9.365 30.11,6.825 7.25,6.825

## Text inside footprints (layer, text, board x,y; h text height)
MB1: Top Assembly "AN" at 10.037,27.221 h1.2; Top Assembly "INT" at 26.108,24.636 h1.2; Top Assembly "GND" at 24.703,9.388 h1.2; Top Assembly "CS" at 10.037,22.141 h1.2; Top Assembly "RST" at 10.037,24.681 h1.2; Top Assembly "5V" at 26.716,11.991 h1.2; Top Assembly "TX" at 26.677,22.151 h1.2; Top Assembly "RX" at 26.55,19.611 h1.2; Top Assembly "SDA" at 24.94,14.544 h1.2; Top Assembly "SDO" at 10.037,17.08 h1.2; Top Assembly "GND" at 10.037,9.478 h1.2; Top Assembly "3V3" at 10.037,12.037 h1.2; Top Assembly "PWM" at 24.306,27.21 h1.2; Top Assembly "SCK" at 10.037,19.525 h1.2; Top Assembly "SCL" at 25.274,17.112 h1.2; Top Assembly "SDI" at 10.037,14.552 h1.2